# Altium PCB BMS_LOST_V2.PcbDoc
Units mil, origin at the board's own origin, x right, y up, seen from the top; angles counter-clockwise.
Board outline 1710.28 x 1731.8 mil, 2 copper layers (Top Layer, Bottom Layer); 24 components, 33 nets, 160 pads, 20 vias.
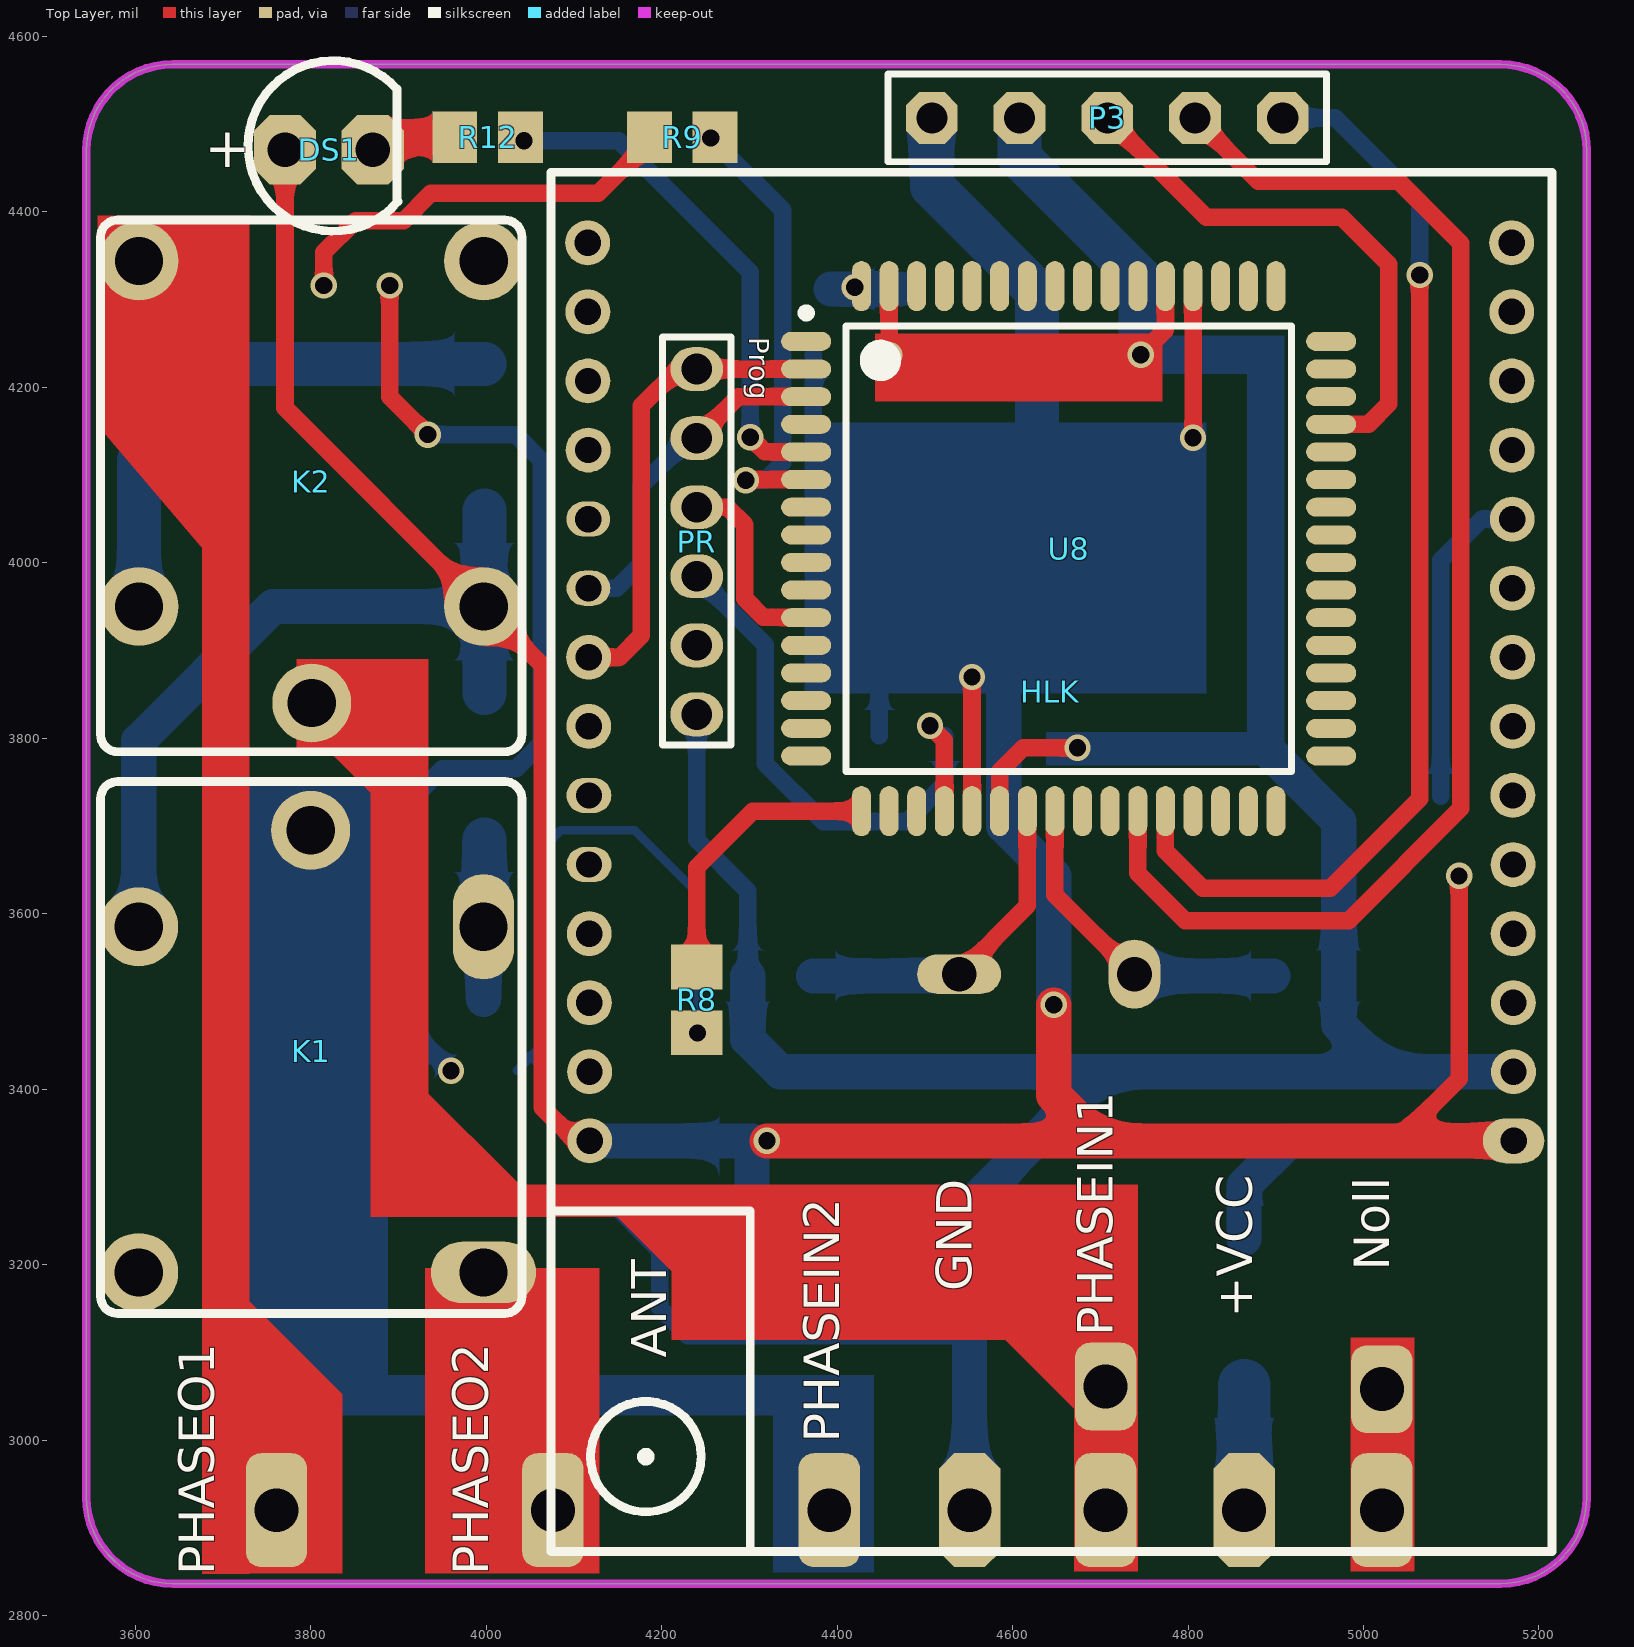
[diagram p0: Top Layer view]
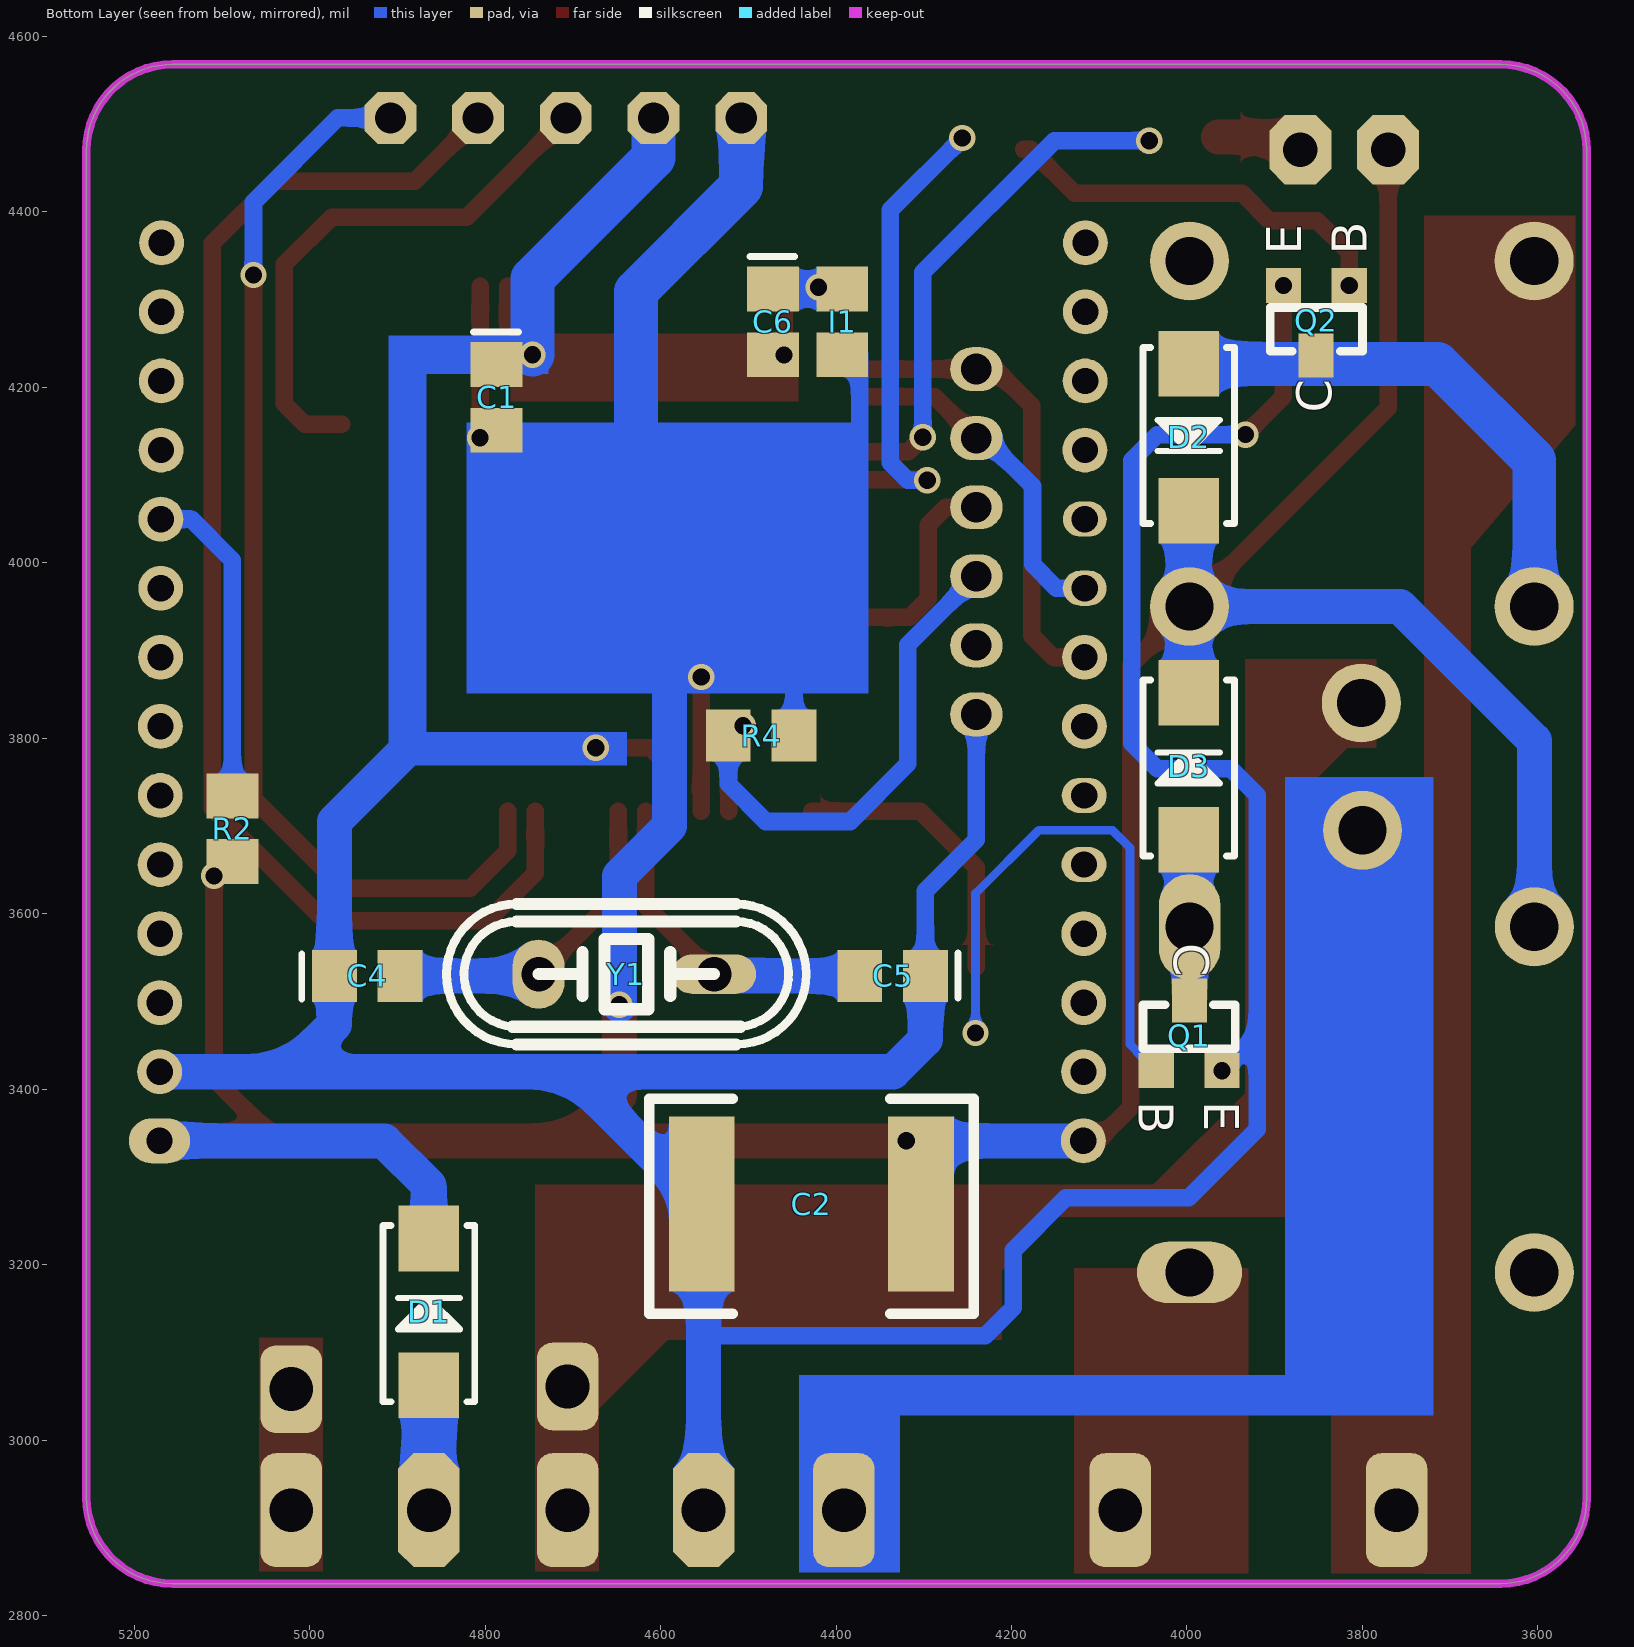
[diagram p1: Bottom Layer view, seen from below]
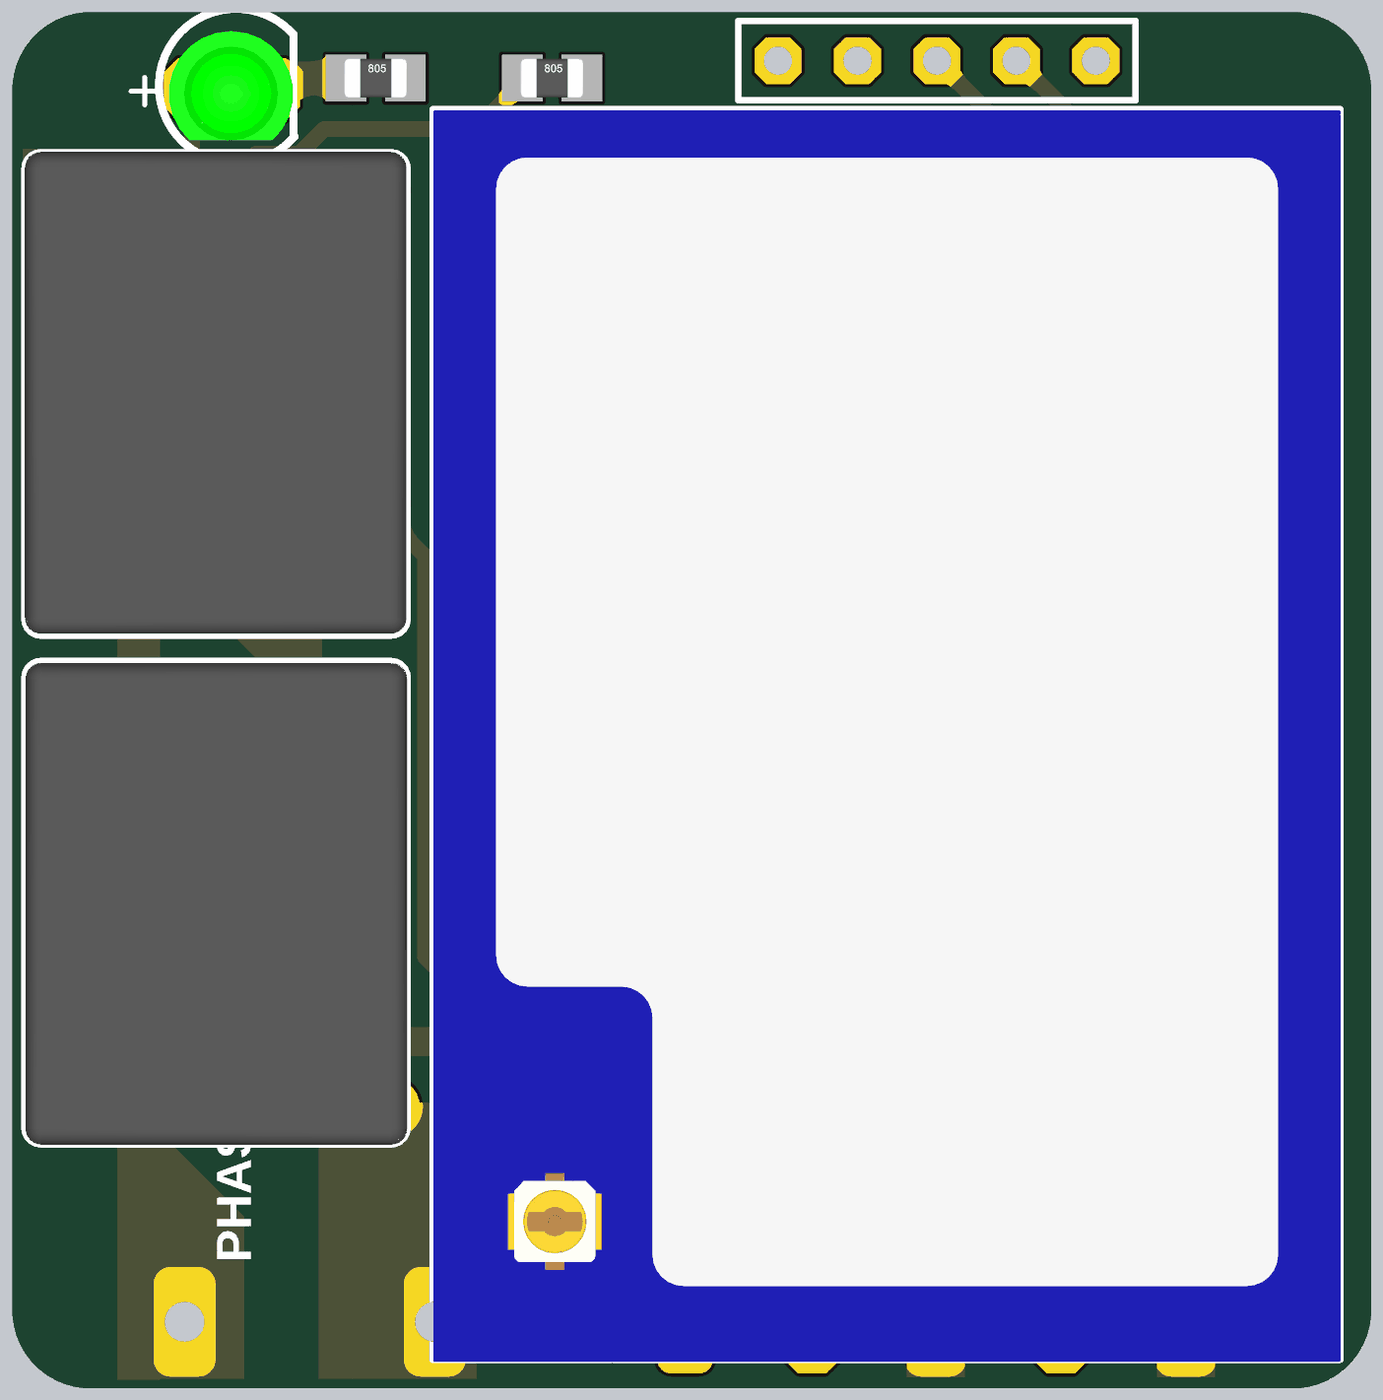
[diagram p2: 3D render of the assembled board from above, using the file's embedded part models]
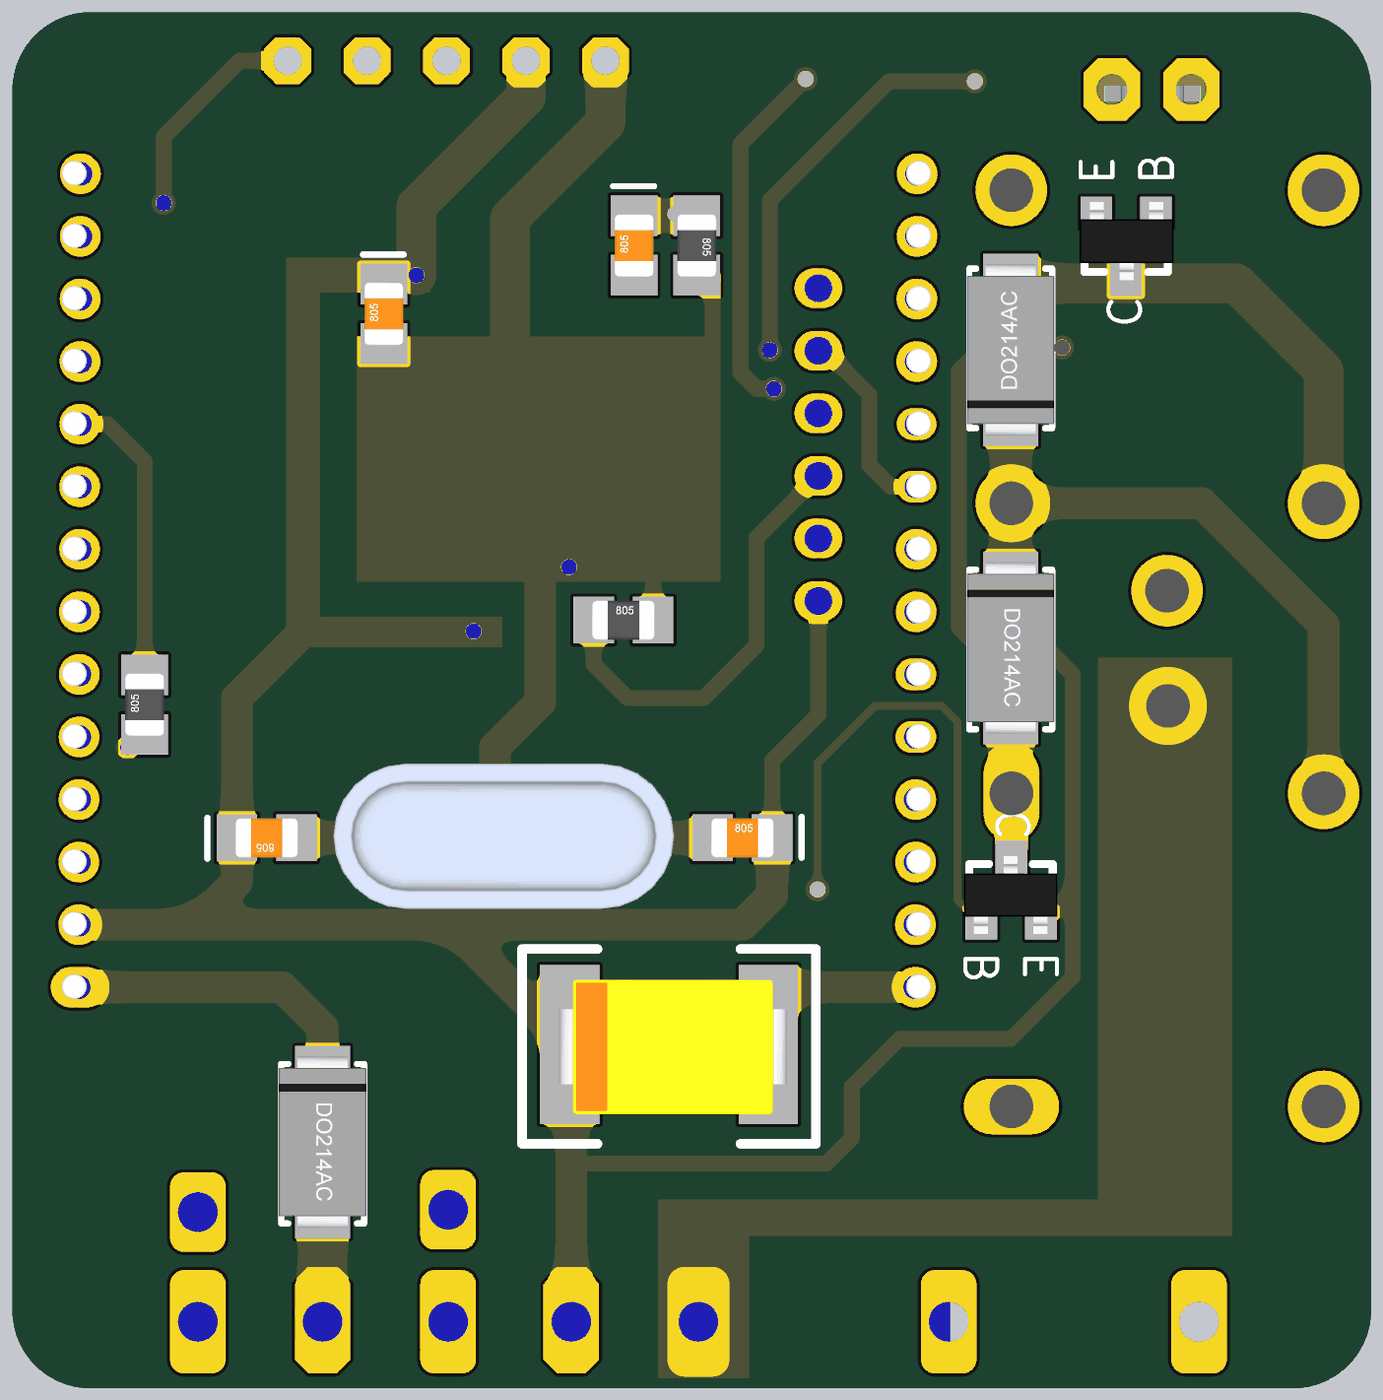
[diagram p3: 3D render of the assembled board from below, using the file's embedded part models]

## Layer stack, top to bottom
Top Solder: solder mask 0.4, Solder Resist, Dk 3.5
Top Layer: signal copper 1.4
Dielectric 1: dielectric 12.6, FR-4, Dk 4.8
Bottom Layer: signal copper 1.4
Bottom Solder: solder mask 0.4, Solder Resist, Dk 3.5

## Board outline
3544.25,2934.68 3544.25,4469.63 cw(c3642.68,4469.63) 3642.68,4568.05 5156.11,4568.05 cw(c5156.11,4469.63) 5254.53,4469.63 5254.53,2934.68 cw(c5156.11,2934.68) 5156.11,2836.25 3642.68,2836.25 cw(c3642.68,2934.68)

## Design rules (kind name [scope] priority, off if disabled: settings)
Clearance [All] p1: gap=10
PolygonConnect [All] p1: connectstyle=Relief reliefconductorwidth=10 reliefentries=4 polygonreliefangle="90 Angle" airgapwidth=10
RoutingVias [All] p1: holewidth=28 width=50 viastyle="Through Hole" minholewidth=28 minwidth=50 maxholewidth=28 maxwidth=50
SolderMaskExpansion [All] p1: expansion=4
Width [All] p1: maxlimit=80 minlimit=10 preferedwidth=10
30 further rules are at their usual default settings.

## Components (designator, comment, footprint, x,y, rotation, side; value= is the part's Value field where it differs from the comment)
C1 "100nf" Cap0805 4787,4151 r90 bottom
C2 "Cap_4mm" 2220 4549,3271 r180 bottom
C4 "CAP 805" Cap0805 4897,3529 r0 bottom
C5 "CAP 805" Cap0805 4373,3529 r180 bottom
C6 "Cap0805" Cap0805 4472,4237 r90 bottom
D1 "SS34" Diod-1A-SMD 4863,3060 r90 bottom
D2 "SS34" Diod-1A-SMD 3999,4229 r270 bottom
D3 "SS34" Diod-1A-SMD 3997,3682 r90 bottom
DS1 "LED1" LED3MM 3876,4473 r180 top
HLK "HLK_WifiModule" HLK 5170,4366 r180 top locked
I1 "Indicator100uH" Indicator0805 4395,4310 r270 bottom
K1 "Relay" RelayMilionMiniS-Z#1 3997,3191 r90 top
K2 "Relay" RelayMilionMiniS-Z#2 3604.18,4344 r270 top
P3 "Header 5" HDR1X5 4508,4507 r0 top (schematic designator P2)
PR "Programmer" Programmer 4241,4218 r270 top
Q1 "BC817" SOT23 4037,3420 r180 bottom
Q2 "BC817" SOT23 3813,4317 r0 bottom
R2 "Res 0805" R0805 5088,3661 r90 bottom
R4 "Res 0805" R0805 4521,3803 r180 bottom
R8 "Res 0805" R0805 4240,3466 r90 top
R9 "Res 0805" R0805 4188,4485.02 r0 top
R12 "330" R0805 3966,4485.02 r0 top
U8 "ATmega64-16AU" 64A_L 4664,4016 r0 top
Y1 "Xtal" CrystallB 4740,3530 r180 bottom

## Footprints (in the part's own frame and the unit in brackets; to place one, negate y for a bottom-side part, rotate by r counter-clockwise, add the part's x,y. Pads: shape width x height; smd on the part's side, far side on the other; paste and mask are expansions set on the pad)
64A_L [mm] "Thin QFP, 64-Leads, Body 14x14mm, Pitch 0.8mm, IPC High Density"
  oval 1.45x0.55 smd: 1(-7.6,6) 2(-7.6,5.2) 3(-7.6,4.4) 4(-7.6,3.6) 5(-7.6,2.8) 6(-7.6,2) 7(-7.6,1.2) 8(-7.6,0.4) 9(-7.6,-0.4) 10(-7.6,-1.2) 11(-7.6,-2) 12(-7.6,-2.8) 13(-7.6,-3.6) 14(-7.6,-4.4) 15(-7.6,-5.2) 16(-7.6,-6) 33(7.6,-6) 34(7.6,-5.2) 35(7.6,-4.4) 36(7.6,-3.6) 37(7.6,-2.8) 38(7.6,-2) 39(7.6,-1.2) 40(7.6,-0.4) 41(7.6,0.4) 42(7.6,1.2) 43(7.6,2) 44(7.6,2.8) 45(7.6,3.6) 46(7.6,4.4) 47(7.6,5.2) 48(7.6,6)
  oval 0.55x1.45 smd: 17(-6,-7.6) 18(-5.2,-7.6) 19(-4.4,-7.6) 20(-3.6,-7.6) 21(-2.8,-7.6) 22(-2,-7.6) 23(-1.2,-7.6) 24(-0.4,-7.6) 25(0.4,-7.6) 26(1.2,-7.6) 27(2,-7.6) 28(2.8,-7.6) 29(3.6,-7.6) 30(4.4,-7.6) 31(5.2,-7.6) 32(6,-7.6) 49(6,7.6) 50(5.2,7.6) 51(4.4,7.6) 52(3.6,7.6) 53(2.8,7.6) 54(2,7.6) 55(1.2,7.6) 56(0.4,7.6) 57(-0.4,7.6) 58(-1.2,7.6) 59(-2,7.6) 60(-2.8,7.6) 61(-3.6,7.6) 62(-4.4,7.6) 63(-5.2,7.6) 64(-6,7.6)
  silkscreen extent -7.72,-6.45 6.45,6.95, body extent -7,-7 7,7, height 1.2
2220 [mil]
  rect 75x200 smd: 1(-4,-2) 2(246,-2)
  silkscreen extent -64,-127 306,118, body extent -18,-90 270,80, height 122
Cap0805 [mm]
  rect 1.3x1.5 smd: 1(0,0) 2(1.9,0)
  silkscreen extent 2.84,-0.64 2.84,0.67, body extent -0.05,-0.62 1.95,0.63, height 0.78
CrystallB [mil]
  oval 95.55x45 hole 39.37: 1(201,1)
  oval 59.06x78.74 hole 39.37: 2(1,1)
  silkscreen extent -104,-79 306,81, body extent -111,-91 319,93, height 138
Diod-1A-SMD [mm]
  rect 1.9x1.75 smd: A(0.059,0.025) K(4.309,0.025)
  silkscreen extent -0.42,-1.3 4.68,1.35, body extent -0.56,-1.37 4.93,1.42, height 2.24
HDR1X5 [mm] "Connector; Header; 5 Position"
  oct 1.5x1.5 hole 0.9: 1-TX(7.62,0) 2(10.16,0) 3(5.08,0) GND(2.54,0) VCC(0,0)
  silkscreen extent -1.27,-1.27 11.43,1.27
HLK [mm]
  oval 1.778x1.3 hole 0.762: 1(-0.03,26.035)
  round 1.3 hole 0.762: 2(-0.025,24.035) 3(-0.021,22.035) 4(-0.016,20.035) 5(-0.012,18.035) 6(-0.007,16.035) 7(-0.002,14.035) 8(0.002,12.035) 9(0.007,10.035) 10(0.011,8.035) 11(0.016,6.035) 12(0.021,4.035) 13(0.025,2.035) 14(0.03,0.035) 15(26.78,0.035) 16(26.775,2.035) 17(26.771,4.035) 18(26.766,6.035) 21(26.752,12.035) 22(26.748,14.035) 25(26.734,20.035) 26(26.729,22.035) 27(26.725,24.035) 28(26.72,26.035)
  oval 1.27x1.016 hole 0.762: 19(26.761,8.035) 20(26.757,10.035)
  oval 1.3x1.016 hole 0.762: 23(26.743,16.035) 24(26.738,18.035)
  silkscreen extent -1.14,-2.01 27.84,37.92, body extent -1.17,-1.99 27.83,38.01, height 5.25
Indicator0805 [mm]
  rect 1.3x1.5 smd: 1(-0.046,0.051) 2(1.854,0.051)
  body extent -0.1,-0.57 1.9,0.68, height 0.78
LED3MM [mm]
  oct 1.8x2 hole 1: A(2.675,0.059) K(0.135,0.059)
  silkscreen extent -0.6,-2.52 3.74,2.42, body extent -0.56,-1.81 3.43,1.68, height 7.88
Programmer [mil]
  oval 50x60 hole 35: 1(-2.7,-1) 2(76.04,-1) 3(154.78,-1) 4(233.52,-1) 5(312.26,-1) 6(391,-1)
  silkscreen extent -39,-40 426,38
R0805 [mm]
  rect 1.3x1.5 smd: 1(-0.046,0) 2(1.854,0)
  body extent -0.1,-0.62 1.9,0.63, height 0.78
RelayMilionMiniS-Z#1 [mil]
  round 90 hole 55: 1(394,393) 2(0,393) 5(504,197)
  oval 70x120 hole 55: 3(0,0)
  oval 120x70 hole 55: 4(394,0)
  silkscreen extent -47,-44 560,437, body extent -48,-44 558,436, height 512
RelayMilionMiniS-Z#2 [mil]
  round 90 hole 55: 1(394,393) 2(0,393) 3(0,0) 4(394,0) 5(504,197)
  silkscreen extent -47,-44 560,437, body extent -48,-44 558,436, height 512
SOT23 [mil]
  rect 40x40 smd: 1(2,1) 2(77,1)
  rect 40x50 smd: 3(40,81)
  silkscreen extent -13,26 92,76, body extent -20,-12 98,86, height 41

## Part data
C1 C4 C5: library part Cap0805, "surface mount capacitor (size 805)"
C2: library part Cap_Pola
C6: "surface mount capacitor (size 805)"
D1 D2 D3: library part Diode
K1 K2: library part RelayMilon
P3: "Header, 5-Pin"
Q1 Q2: library part "Transistor NPN"
R12: library part "Res 0805"
U8: "8-bit AVR Microcontroller, 4.5-5.5V, 64KB Flash, 2KB EEPROM, 4KB SRAM, 64-pin TQFP, Industrial Grade (-40°C to 85°C), Pb-Free"
Y1: library part Crystal

## Free pads (board coordinates)
  rrect50% 70x130 hole 50: 0(3761,2920) 0(4076,2920) 0(4391,2920) 0(4706,2920) 0(5021,2920)
  oct 70x130 hole 50: 0(4551,2920) 0(4864,2920)
  rrect50% 70x100 hole 50: 0(4706,3061) 0(5021,3058)

## Via types
v1: diameter 30, hole 19.68, Top Layer to Bottom Layer, tented both sides, 20 vias

## Nets (pads, with @x,y where several pads share a name; then routed paths per layer and width w, separated by ;. In a path a pad name is that pad's centre, name@x,y a point inside that pad or via, vN(x,y) a via of type N, cw(c..) or ccw(c..) an arc to the next point about the centre after c; other vN are vias at no path point)
AVCC: C6.2 I1.1 U8.64 | length 79
  Bottom Layer w40: I1.1 C6.2
  other v1: 4420,4314
B_RST: 
B_RX: 
B_TX: 
DE: P3.3 U8.45 | length 624.6
  Top Layer w20: P3.3 4821,4394 4975,4394 5029,4340 5029,4181 5005.73,4157.73 U8.45
GND: C1.2 C2.1 C4.2 C5.2 C6.1 HLK.2 P3.GND pad.0@4551,2920 PR.6 Q1.2 Q2.2 U8.22 U8.53 U8.63 | length 4954.5
  Top Layer w20: v1(3890,4316) 3890,4189.3 v1(3933.3,4146) ; v1(4459.28,4236.72) U8.63 ; U8.22 4585.26,3762.26 4612,3789 v1(4674,3789) ; v1(4746,4237) 4774.24,4265.24 U8.53
  Bottom Layer w20: v1(3933.3,4146) 4034,4146 4063,4117 4063,3794 4034,3765 3950,3765 3920,3735 3920,3461 ; v1(3960,3421) 3920,3461 ; PR.6@4240,3840 4240,3684 4298.2,3625.8 C5.2 ; 4551,3111 4543,3119 4230,3119 4198,3151 4198,3216 4138,3276 3998,3276 3920,3354 3920,3461
  Bottom Layer w40: C5.2 4298.2,3456.8 4335.26,3419.74 4703.74,3419.74 ; pad.0@4551,2920 4551,3111 4551,3267 4703.74,3419.74 ; 4887,3790 4971.8,3705.2 C4.2 4971.8,3473.94 5026,3419.74 ; HLK.2 5026,3419.74 ; 4703.74,3419.74 5026,3419.74
  Bottom Layer w50: P3.GND 4608,4462 4746,4324 v1(4746,4237)
LED_BL: 
MISO: HLK.20 PR.2 U8.3 | length 390.8
  Top Layer w20: PR.2 4287.27,4189.23 U8.3
  Bottom Layer w20: HLK.20 4148.92,3970.92 4176,3998 4176,4087 4230.96,4141.96 PR.2
MOSI: HLK.21 PR.1 U8.2 | length 537.6
  Top Layer w20: HLK.21 4152.18,3892.18 4177,3917 4177,4179 4218.7,4220.7 PR.1 U8.2
NetD2_A: D2.A K2.4 Q2.3 | length 606
  Bottom Layer w50: K2.4 3604.18,4116.51 3714.34,4226.66 D2.A
NetD3_A: D3.A K1.4 Q1.3 | length 182.8
  Bottom Layer w40: Q1.3@3997,3502 K1.4
  Bottom Layer w50: K1.4 3998,3586 D3.A
NetDS1_K: DS1.K R12.1 | length 99.9
  Top Layer w40: DS1.K 3885.02,4485.02 R12.1 ; DS1.K@3877.89,4470.69 DS1.K@3878.2,4471
NetHC_34: 
NetQ1_1: Q1.1 R8.1 | length 639.5
  Bottom Layer w10: Q1.1 4065,3451 4065,3675 4085,3695 4169,3695 4241,3623 v1(4241,3464)
NetQ2_1: Q2.1 R9.1 | length 457.4
  Top Layer w20: v1(3815,4316) 3815,4353.63 3851.37,4390 3906,4390 3937,4421 4128,4421 4178,4471 R9.1@4186.2,4471
PHASE1: K1.3
PHASE2: K2.3
PHASEN1: K1.5
PHASEN2: K2.5
RE1: R8.2 U8.17 | length 328.2
  Top Layer w20: R8.2 4240,3653 4303.79,3716.79 U8.17
RE2: R9.2 U8.6 | length 522.3
  Top Layer w20: v1@4296.74,4094.74 U8.6
  Bottom Layer w20: v1(4256,4484) 4338,4402 4338,4114 4318,4094 v1(4296,4094)
RFU: R12.2 U8.5 | length 578.9
  Top Layer w20: v1(4301,4143) 4317.76,4126.24 U8.5
  Bottom Layer w20: v1(4043,4481) 4151,4481 4301,4331 v1(4301,4143)
RST: PR.4 R4.1 U8.20 | length 654.8
  Top Layer w20: v1(4506,3814) 4522.27,3797.73 U8.20
  Bottom Layer w20: PR.4 4318,3906.48 4318,3771 4384,3705 4480,3705 4522.8,3747.8 R4.1
RXD1: P3.1-TX U8.27 | length 1520.5
  Top Layer w20: U8.27 4742.74,3646.26 4797,3592 4983,3592 5111,3720 5111,4364 5040,4435 4880,4435 P3.1-TX
SCK: PR.3 U8.11 | length 226.2
  Top Layer w20: PR.3 4274.78,4063.22 4295,4043 4295,3959 4316.07,3937.93 4364.12,3937.93 U8.11
TXD1: P3.2 U8.28 | length 1270.5
  Top Layer w20: U8.28 4774.24,3671.76 4817,3629 4962,3629 5064,3731 v1(5064,4328)
  Bottom Layer w20: P3.2 4968,4507 5064,4411 v1(5064,4328)
VCC: C1.1 C2.2 D1.K D2.K D3.K DS1.A HLK.1 HLK.28 I1.2 K1.1 K2.1 P3.VCC R2.1 R4.2 U8.21 U8.52 | length 5697.7
  Top Layer w20: DS1.A 3770.69,4176.49 K2.1 4064,3883.18 4064,3379 4102,3341 HLK.28 ; U8.21 v1(4553.76,3869.76) ; v1(4805.73,4142.27) U8.52 ; 5038,3341 5109,3412 v1(5109,3643)
  Top Layer w40: v1(4320,3341) 4699,3341 ; v1(4647,3496) 4647,3393 4699,3341 ; HLK.1 5038,3341 4699,3341
  Bottom Layer w20: 4373,4134 I1.2@4373,4237 ; R4.2 4448,3915 4459,3926
  Bottom Layer w40: K1.1 3604,3797 3757,3950 K2.1 ; HLK.28 4303,3341 C2.2 C2.2@4303,3233 ; 4590,3890 4590,3700 4647,3643 v1(4647,3496) ; D1.K 4864,3290 4915,3341 HLK.1
  Bottom Layer w50: D3.K D2.K ; P3.VCC 4508,4429 4628,4309 4628,4119 4542,4119
VCC3.3: 
VCC+3.3V: 
VDD: D1.A pad.0@4864,2920 | length 142.3
  Bottom Layer w60: pad.0@4864,2920 D1.A
W_RST: HLK.10 R2.2 | length 369.9
  Bottom Layer w20: R2.2 5088,4003 5134.66,4049.66 HLK.10
XT1: C4.1 U8.24 Y1.2 | length 382.2
  Top Layer w20: U8.24 4648.25,3621.75 Y1.2
  Bottom Layer w40: Y1.2 4741,3529 C4.1
XT2: C5.1 U8.23 Y1.1 | length 384.8
  Top Layer w20: Y1.1 4616.76,3608.76 U8.23
  Bottom Layer w40: C5.1 4537,3529 Y1.1
pads on no net: HLK.3 HLK.4 HLK.5 HLK.6 HLK.7 HLK.8 HLK.9 HLK.11 HLK.12 HLK.13 HLK.14 HLK.15 HLK.16 HLK.17 HLK.18 HLK.19 HLK.22 HLK.23 HLK.24 HLK.25 HLK.26 HLK.27 K1.2 K2.2 PR.5 U8.1 U8.4 U8.7 U8.8 U8.9 U8.10 U8.12 U8.13 U8.14 U8.15 U8.16 U8.18 U8.19 U8.25 U8.26 U8.29 U8.30 U8.31 U8.32 U8.33 U8.34 U8.35 U8.36 U8.37 U8.38 U8.39 U8.40 U8.41 U8.42 U8.43 U8.44 U8.46 U8.47 U8.48 U8.49 U8.50 U8.51 U8.54 U8.55 U8.56 U8.57 U8.58 U8.59 U8.60 U8.61 U8.62

## Keep-outs
Keep-Out Layer:
  the board outline again, w10

## Other copper
Top Layer:
  rectangle net PHASEN2: 3868,3254 4743,3291
  rectangle net PHASEN2: 3868,3286 3934,3890
  rectangle net PHASEN2: 3784,3789 3930,3890
  rectangle net PHASE2: 3677,2848 3836,3052
  rectangle net PHASE2: 3676,2847 3730,4396
  rectangle net PHASE2: 3557,4156 3718,4396
  rectangle net PHASE1: 3930,2848 4129,3196
  rectangle net PHASEN2: 4670,2850 4743,3286
  rectangle: 4985,2850 5058,3117
  rectangle net GND: 4443,4184 4771,4261
  rectangle net PHASEN2: 4211,3114 4743,3286
  region net PHASEN2: 4521,3283 4678,3126 4732,3126 4732,3256 4705,3283
  region net PHASEN2: 3901,3413 3916,3413 4048,3281 3909,3281 3906,3278
  region net PHASEN2: 3784,3789 3817,3789 3898,3708 3898,3815 3900,3817
  region net PHASE2: 3557.5,4156.5 3694,3996 3718,3996 3695,4019 3695,4190
  region net PHASE2: 3836,3052 3706,3182 3682,3182 3693,3171 3693,2977
  region net PHASEN2: 4552,3154 4716,2990 4716,3174 4712,3178
  region net PHASEN2: 4137,3267 4265,3139 4279,3139 4279,3273 4280,3274
Bottom Layer:
  rectangle net PHASEN1: 4327,2849 4442,3074
  rectangle net PHASEN1: 3719,3028 4442,3074
  rectangle net PHASEN1: 3719,3028 3888,3756
  rectangle net GND: 4728,4215 4910,4259
  rectangle net GND: 4867,3769 4910,4259
  rectangle net GND: 4638,3769 4910,3807
  rectangle net VCC: 4363,3851 4821,4160

## Silkscreen, mask and mechanical layers (free items; w line width, h text height)
Top Overlay:
  text "Noll" at 5043,3193.09 h70 r90
  text "GND" at 4567,3169.43 h70 r90
  text "+VCC" at 4887,3139.5 h70 r90
  text "PHASEIN1" at 4728,3118 h70 r90
  text "PHASEIN2" at 4416,2996.94 h70 r90
  text "PHASEO1" at 3704,2846 h70 r90
  text "PHASEO2" at 4016,2846 h70 r90

## Text inside footprints (layer, text, board x,y; h text height)
DS1: Top Overlay "+" at 3678.96,4451.01 h45.28
HLK: Top Overlay "ANT" at 4205,3094 h40 r90
PR: Top Overlay "Prog" at 4292,4257 h39.37 r270
Q1: Bottom Overlay "B" at 4055,3386 h40 r90; Bottom Overlay "E" at 3980,3386 h40 r90; Bottom Overlay "C" at 4015,3566 h40 r90
Q2: Bottom Overlay "B" at 3795,4351 h40 r270; Bottom Overlay "E" at 3870,4351 h40 r270; Bottom Overlay "C" at 3835,4171 h40 r270